# Altium PCB Intelligent_Agriculture.PcbDoc (part 1 of 5)
Units mm, origin at the board's own origin, x right, y up, seen from the top; angles counter-clockwise.
Board outline 99.69 x 99.69 mm, 2 copper layers (Top Layer, Bottom Layer); 90 components, 60 nets, 339 pads, 86 vias.
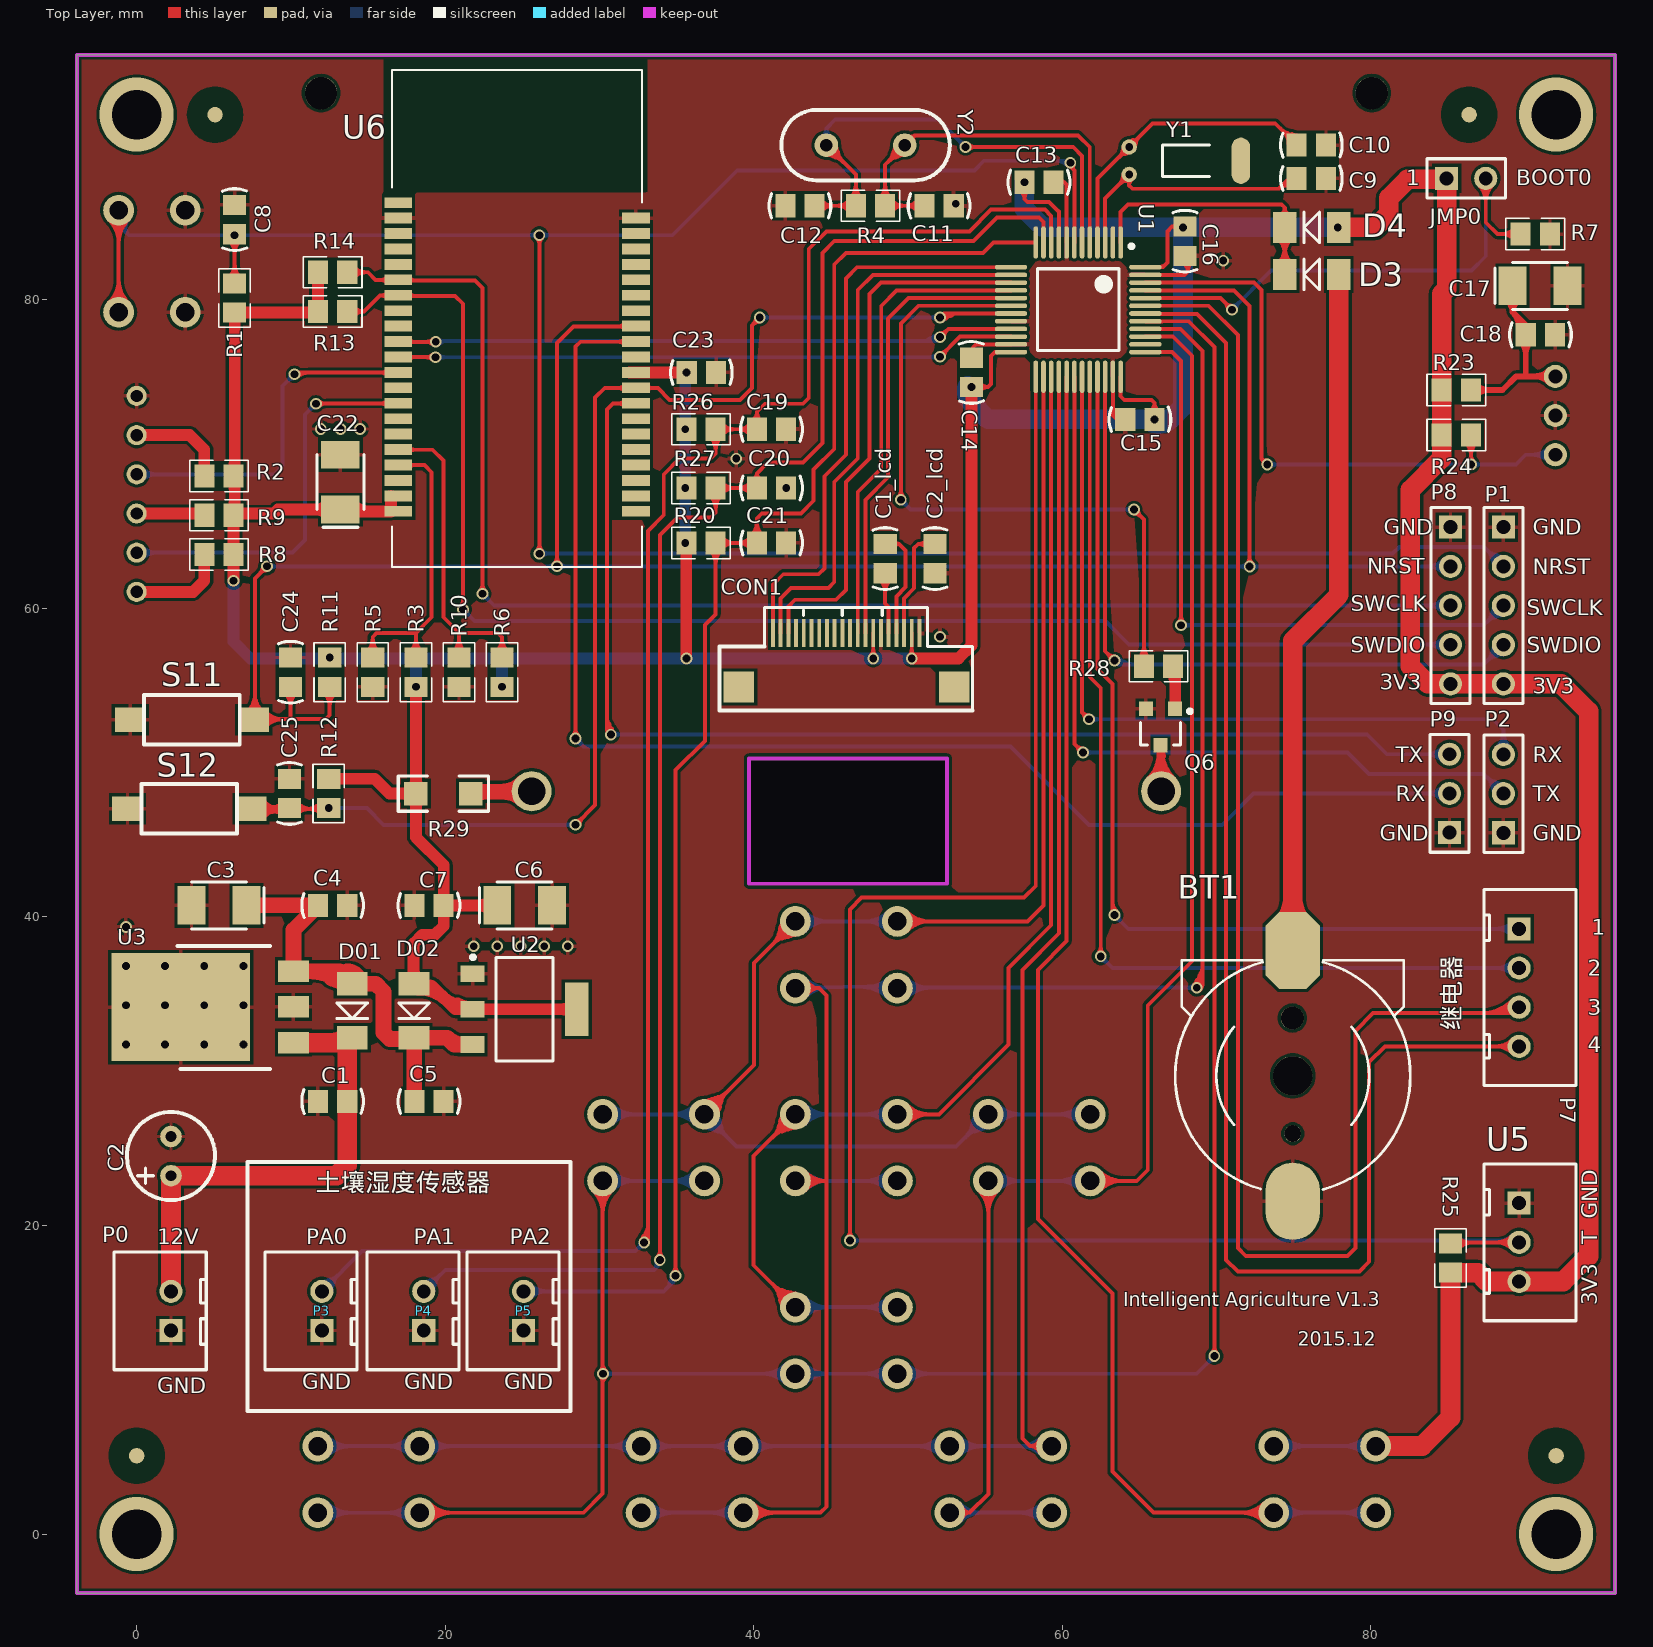
[diagram p0: Top Layer view]
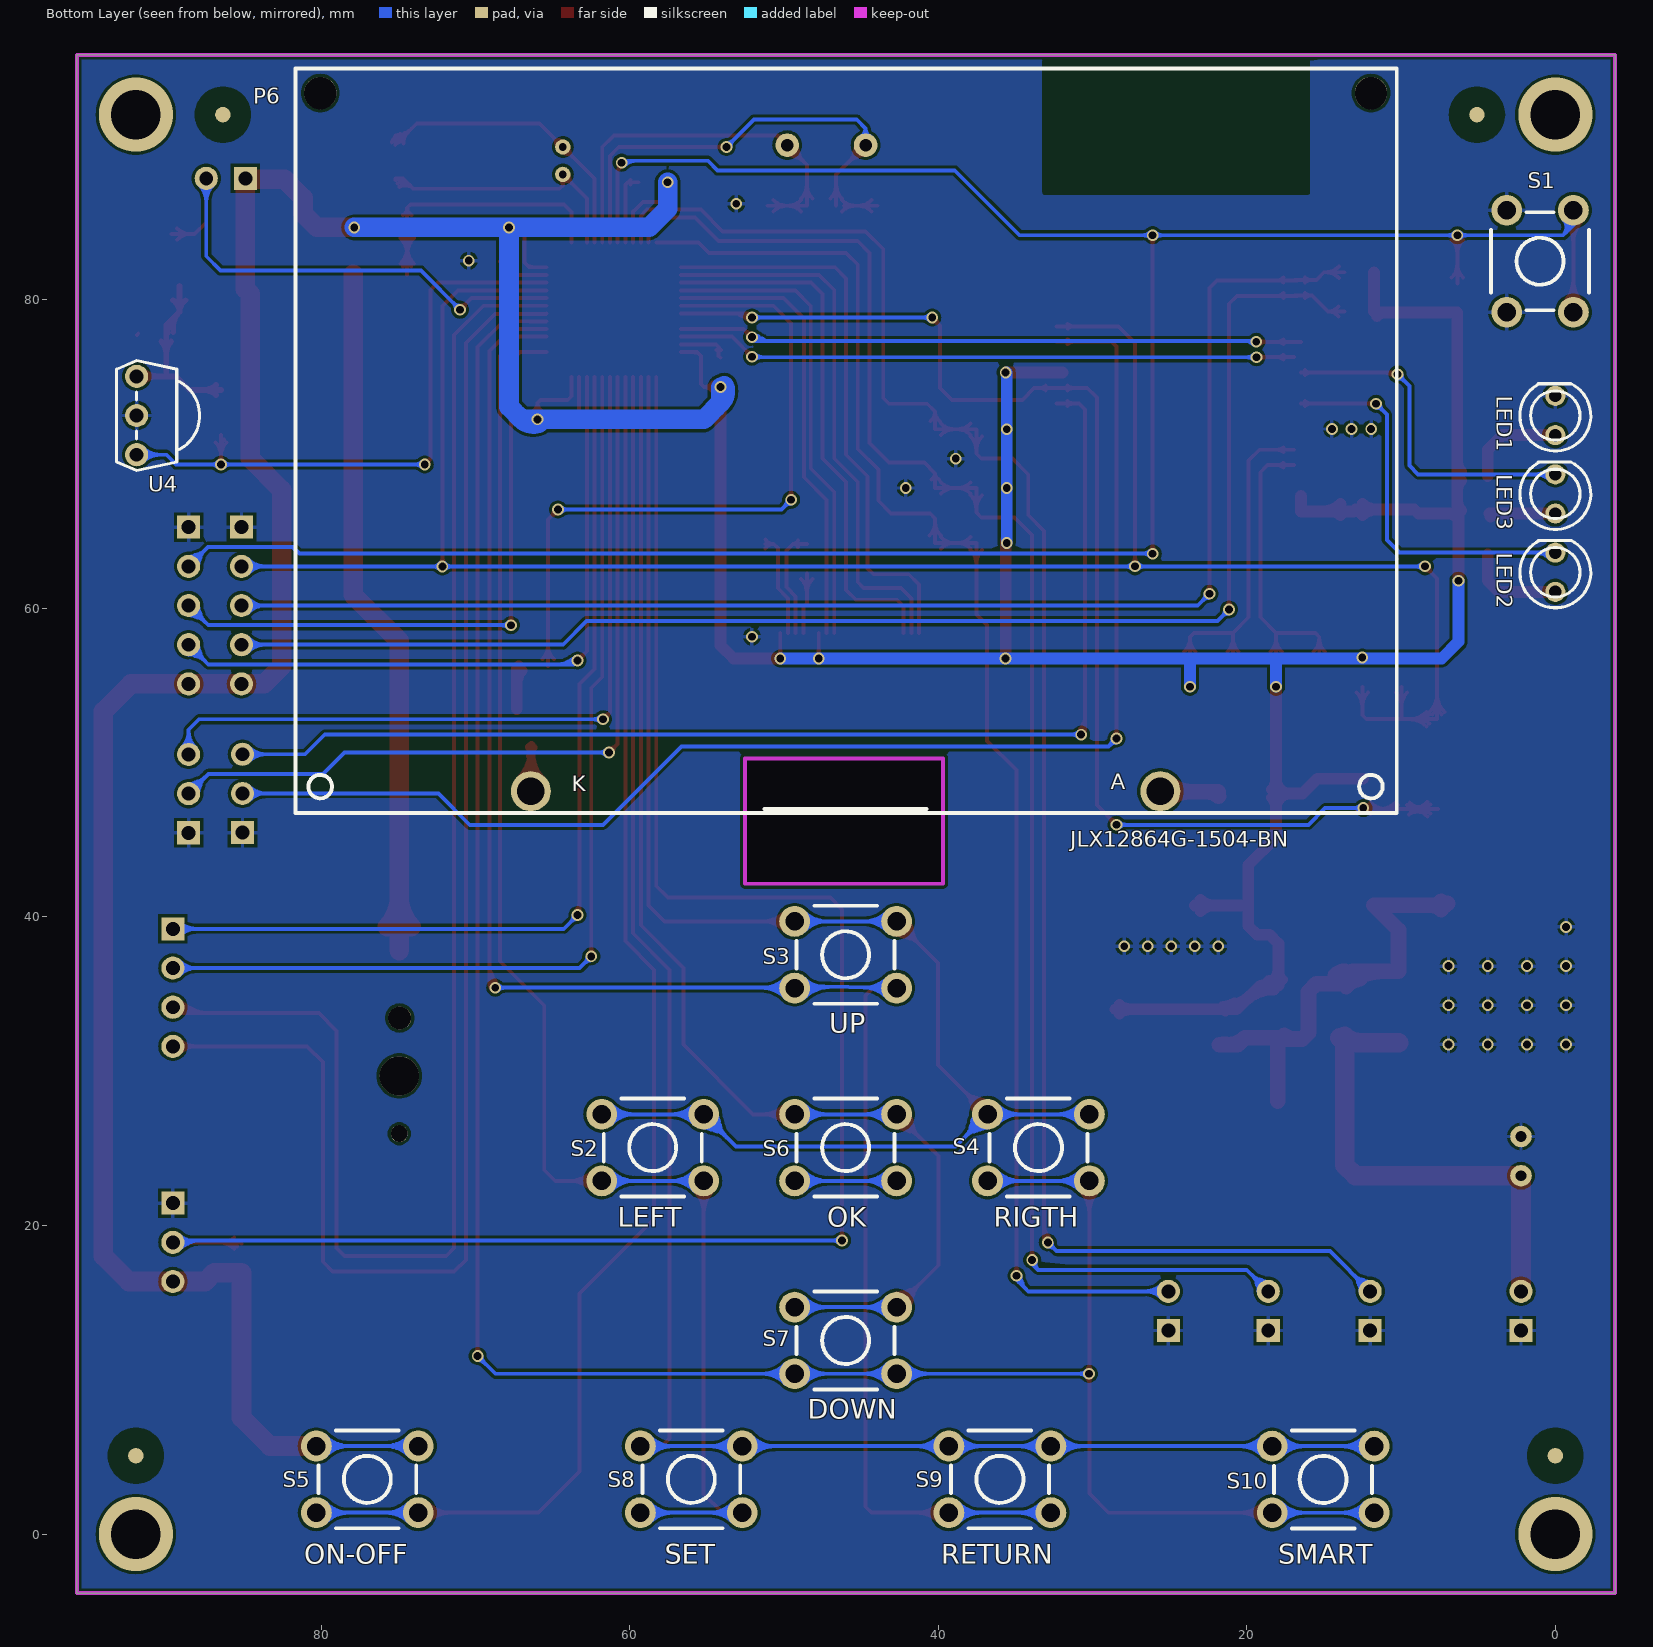
[diagram p1: Bottom Layer view, seen from below]

## Layer stack, top to bottom
Top Layer: signal copper 0.0356
Dielectric: dielectric 0.32, FR-4, Dk 4.8
Bottom Layer: signal copper 0.0356

## Board outline
-3.873,-3.822 -3.873,95.873 95.822,95.873 95.822,-3.822
cut-out: 52.515,50.28 39.688,50.28 39.688,42.152 52.515,42.152

## Design rules (kind name [scope] priority, off if disabled: settings)
Clearance [All] p1: gap=0.191
HoleSize [All] p1: absolutevalues=TRUE maxlimit=5.08 minlimit=0.025 maxpercent=80.000 minpercent=20.000
PolygonConnect [All] p1: connectstyle=Relief reliefconductorwidth=0.254 reliefentries=4 polygonreliefangle="90 Angle"
RoutingVias [All] p1: holewidth=0.711 width=1.27 viastyle="Through Hole" minholewidth=0.711 minwidth=1.27 maxholewidth=0.711 maxwidth=1.27
SMDNeckDown [All] p1: percent=120.000
SilkscreenOverComponentPads SilkToSolderMaskClearance [IsPad] p1: minsilkscreentomaskgap=0.254
SolderMaskExpansion [All] p1: expansion=0.102
Width [All] p1: maxlimit=1.27 minlimit=0.203 preferedwidth=0.508
26 further rules are at their usual default settings.

## Classes and differential pairs
component class U_Intelligent_Agriculture: BT1 C1 C1_lcd C2 C2_lcd C3 C4 C5 C6 C7 C8 C9 C10 C11 C12 C13 C14 C15 C16 C17 C18 C19 C20 C21 CON1 D01 D02 D3 D4 JMP0 LED1 P0 P1 P2 P3 P4 P5 P6 P7 Q6 R1 R2 R4 R7 R20 R23 R24 R25 R26 R27 R28 R29 S1 S2 S3 S4 S5 S6 S7 S8 S9 S10 U1 U2 U3 U4 U5 Y1 Y2
component class U_Intelligent_Agriculture_Wifi: C22 C23 C24 C25 LED2 LED3 P8 P9 R3 R5 R6 R8 R9 R10 R11 R12 R13 R14 S11 S12 U6

## Components (designator, comment, footprint, x,y, rotation, side; value= is the part's Value field where it differs from the comment)
BT1 "Battery" CR1220 74.93,29.701 r180 top
C1 "Cap" C-RAD-0805 12.7,28.05 r180 top
C1_lcd "Cap" C-RAD-0805 48.514,63.229 r90 top
C2 "Cap Pol1" C-RB-2.54 2.223,24.499 r90 top
C2_lcd "Cap" C-RAD-0805 51.74,63.229 r270 top
C3 "Cap Pol" CAP-3528 5.334,40.75 r180 top
C4 "Cap" C-RAD-0805 12.7,40.75 r0 top
C5 "Cap" C-RAD-0805 18.948,28.05 r0 top
C6 "Cap Pol" CAP-3528 25.146,40.75 r0 top
C7 "Cap" C-RAD-0805 18.948,40.75 r180 top
C8 "Cap" C-RAD-0805 6.35,85.2 r270 top
C9 "Cap" C-RAD-0805 76.137,87.872 r0 top
C10 "Cap" C-RAD-0805 76.137,90.031 r0 top
C11 "Cap" C-RAD-0805 52.007,86.094 r0 top
C12 "Cap" C-RAD-0805 42.99,86.094 r180 top
C13 "Cap" C-RAD-0805 58.484,87.618 r0 top
C14 "Cap" C-RAD-0805 54.102,75.294 r90 top
C15 "Cap" C-RAD-0805 65.024,72.246 r180 top
C16 "Cap" C-RAD-0805 67.945,83.803 r270 top
C17 "Cap Pol" CAP-3528 90.957,80.907 r0 top
C18 "Cap" C-RAD-0805 90.983,77.732 r0 top
C19 "Cap" C-RAD-0805 41.148,71.611 r180 top
C20 "Cap" C-RAD-0805 41.148,67.801 r180 top
C21 "Cap" C-RAD-0805 41.148,64.245 r180 top
C22 "Cap Pol" CAP-3528 13.208,68.182 r90 top
C23 "Cap" C-RAD-0805 36.601,75.294 r180 top
C24 "Cap" C-RAD-0805 9.97,55.868 r90 top
C25 "Cap" C-RAD-0805 9.906,48.006 r90 top
CON1 "LCD_CON20" FPC0.5-20P-A 39.942,56.63 r180 top
D01 "Diode" DIODE-1206 13.97,35.67 r270 top
D02 "Diode" DIODE-1206 17.983,35.67 r270 top
D3 "Diode" DIODE-1206 77.915,81.649 r180 top
D4 "Diode" DIODE-1206 77.915,84.697 r180 top
JMP0 "Header 2" HDR2X1_A 84.9,87.872 r0 top
LED1 "LED0" LED_A2 0,72.5 r270 bottom
LED2 "LED0" LED_A2 0,62.34 r270 bottom
LED3 "LED0" LED_A2 0,67.42 r270 bottom
P0 "Header 2" HDR2X1_B1 2.223,13.196 r90 top
P1 "Header 5" HDR5_A1 88.583,65.266 r270 top
P2 "Header 3" HDR3X1_A 88.583,45.454 r90 top
P3 "Header 2" HDR2X1_B1 12.002,13.196 r90 top
P4 "Header 2" HDR2X1_B1 18.606,13.196 r90 top
P5 "Header 2" HDR2X1_B1 25.083,13.196 r90 top
P6 "LCDLEDAK" LCD_JLX12864G-1504 81.65,95 r180 bottom
P7 "Header 4" HDR4X1_B1 89.599,39.231 r270 top
P8 "Header 5" HDR5_A1 85.154,65.266 r270 top
P9 "Header 3" HDR3X1_A 85.09,45.466 r90 top
Q6 "S8050" SOT-23 66.358,52.312 r180 top
R1 "Res1" 0805-1 6.35,80.12 r270 top
R2 "Res1" 0805-1 5.334,68.58 r0 top
R3 "Res1" 0805-1 18.098,55.868 r270 top
R4 "Res1" 0805-1 47.562,86.094 r0 top
R5 "Res1" 0805-1 15.304,55.868 r270 top
R6 "Res1" 0805-1 23.686,55.868 r270 top
R7 "Res1" 0805-1 90.653,84.26 r0 top
R8 "Res1" 0805-1 5.334,63.5 r0 top
R9 "Res1" 0805-1 5.334,66.04 r0 top
R10 "Res1" 0805-1 20.892,55.868 r270 top
R11 "Res1" 0805-1 12.51,55.868 r270 top
R12 "Res1" 0805-1 12.446,48.006 r90 top
R13 "Res1" 0805-1 12.7,79.248 r0 top
R14 "Res1" 0805-1 12.7,81.788 r0 top
R20 "Res1" 0805-1 36.576,64.245 r180 top
R23 "Res1" 0805-1 85.535,74.156 r0 top
R24 "Res1" 0805-1 85.535,71.235 r0 top
R25 "Res1" 0805-1 85.154,17.895 r270 top
R26 "Res1" 0805-1 36.576,71.611 r180 top
R27 "Res1" 0805-1 36.576,67.801 r180 top
R28 "Res1" 0805-1 66.231,56.249 r180 top
R29 "Res1" 1206 19.876,47.994 r180 top
S1 "SW-PB4" SW_PB4_B1 0.99,82.5 r90 bottom
S2 "SW-LEFT" SW_PB4_B1 58.5,25.051 r180 bottom
S3 "SW-UP" SW_PB4_B1 46,37.551 r180 bottom
S4 "SW-RIGHT" SW_PB4_B1 33.5,25.051 r180 bottom
S5 "SW-WAIT" SW_PB4_B1 77,3.551 r180 bottom
S6 "SW-OK" SW_PB4_B1 46,25.051 r180 bottom
S7 "SW-DOWN" SW_PB4_B1 46,12.551 r180 bottom
S8 "SW-SET" SW_PB4_B1 56,3.551 r180 bottom
S9 "SW-ESC" SW_PB4_B1 36,3.551 r180 bottom
S10 "SW-SMART" SW_PB4_B1 15.05,3.544 r180 bottom
S11 "SW-PB2" SW_PB2-S-3*6*2.5 3.581,52.781 r0 top
S12 "SW-PB2" SW_PB2-S-3*6*2.5 3.404,47.015 r0 top
U1 "STM32F103C" LQFP-48_M 61.024,79.363 r270 top
U2 "AMS1117-3.3" SOT-223 25.146,34.019 r270 top
U3 "LM78M05" TO-252 10.16,31.86 r90 top
U4 "HS0038B" HS0038B 91.949,72.5 r90 bottom
U5 "DS18B20" HDR3X1_B1 89.599,21.451 r270 top
U6 "EMW3165" EMW3165 32.36,66.294 r90 top
Y1 "XTAL_SM" X-TC15_B 63.945,89.015 r90 top
Y2 "XTAL" X-HC49U 47.244,90.026 r0 top

## Footprints (in the part's own frame and the unit in brackets; to place one, negate y for a bottom-side part, rotate by r counter-clockwise, add the part's x,y. Pads: shape width x height; smd on the part's side, far side on the other; paste and mask are expansions set on the pad)
0805-1 [mm]
  rect 1.3x1.5 smd: 1(-0.95,0) 2(0.95,0)
  silkscreen extent -1.91,-1.02 1.91,1.02, body extent -1.14,-0.51 1.14,0.51, height 1
1206 [mil]
  rect 60x60 smd: 1(-70,0) 2(70,0)
  silkscreen extent -115,-45 115,45, body extent -75,-35 75,35, height 39
C-RAD-0805 [mm]
  rect 1.3x1.5 smd: 1(-0.95,0) 2(0.95,0)
  silkscreen extent -2,-0.79 2,0.79, body extent -1.27,-0.64 1.27,0.64, height 0.9
C-RB-2.54 [mm]
  round 1.4 hole 0.7: 1(-1.27,0) 2(1.27,0)
  silkscreen extent -2.85,-2.85 2.85,2.85
CAP-3528 [mm]
  rect 1.8x2.5 smd: 1(-1.778,0) 2(1.778,0)
  silkscreen extent -2.92,-1.52 1.78,1.52, body extent -1.91,-1.4 1.91,1.4, height 1.1
CR1220 [mm]
  round 1.1 hole 1.1: 0(0,3.75)
  round 2.54 hole 2.54: 0(0,0)
  round 1.5 hole 1.5: 0(0.025,-3.75)
  oct 3.5x5 smd: 1(0,-8.128)
  oval 3.5x5 smd: 2(0,8.128)
  silkscreen extent -7.62,-7.5 7.62,7.36
DIODE-1206 [mm]
  rect 1.5x2 smd: 1(0,0) 2(3.5,0)
  silkscreen extent 1.25,-1 2.25,1
EMW3165 [mm] "EMW365 wif"
  rect 0.7x1.8 smd: 1(0,0) 2(1,0) 3(2,0) 4(3,0) 5(4,0) 6(5,0) 7(6,0) 8(7,0) 9(8,0) 10(9,0) 11(10,0) 12(11,0) 13(12,0) 14(13,0) 15(14,0) 16(15,0) 17(16,0) 18(17,0) 19(18,0) 20(19,0) 21(19,15.4) 22(18,15.4) 23(17,15.4) 24(16,15.4) 25(15,15.4) 26(14,15.4) 27(13,15.4) 28(12,15.4) 29(11,15.4) 30(10,15.4) 31(9,15.4) 32(8,15.4) 33(7,15.4) 34(6,15.4) 35(5,15.4) 36(4,15.4) 37(3,15.4) 38(2,15.4) 39(1,15.4) 40(0,15.4) 41(20,15.4)
  silkscreen extent -3.6,-0.4 28.6,15.8
FPC0.5-20P-A [mm]
  rect 0.25x1.8 smd: 1(-1.296,-1.767) 2(-1.796,-1.767) 3(-2.296,-1.767) 4(-2.796,-1.767) 5(-3.296,-1.767) 6(-3.796,-1.767) 7(-4.296,-1.767) 8(-4.796,-1.767) 9(-5.296,-1.767) 10(-5.796,-1.767) 11(-6.296,-1.767) 12(-6.796,-1.767) 13(-7.296,-1.767) 14(-7.796,-1.767) 15(-8.296,-1.767) 16(-8.796,-1.767) 17(-9.296,-1.767) 18(-9.796,-1.767) 19(-10.296,-1.767) 20(-10.796,-1.767)
  rect 2x2 smd: A(-13.045,1.722) B(0.922,1.722)
  silkscreen extent -14.22,-3.43 2.16,3.26
HDR2X1_A [mm]
  rect 1.5x1.5 hole 0.9: 1(0,0)
  round 1.5 hole 0.9: 2(2.54,0)
  silkscreen extent -1.27,-1.27 3.81,1.27
HDR2X1_B1 [mm]
  rect 1.5x1.5 hole 0.9: 1(0,0)
  round 1.5 hole 0.9: 2(2.54,0)
  silkscreen extent -2.54,-2.29 5.08,3.68, body extent -2.41,-2.16 5.08,3.56, height 1.5
HDR3X1_A [mm]
  rect 1.5x1.5 hole 0.9: 1(0,0)
  round 1.5 hole 0.9: 2(2.54,0) 3(5.08,0)
  silkscreen extent -1.27,-1.27 6.35,1.27
HDR3X1_B1 [mm]
  rect 1.5x1.5 hole 0.9: 1(0,0)
  round 1.5 hole 0.9: 2(2.54,0) 3(5.08,0)
  silkscreen extent -2.54,-2.29 7.62,3.68, body extent -2.54,-2.29 7.62,3.68, height 1.5
HDR4X1_B1 [mm]
  rect 1.5x1.5 hole 0.9: 1(0,0)
  round 1.5 hole 0.9: 2(2.54,0) 3(5.08,0) 4(7.62,0)
  silkscreen extent -2.54,-2.29 10.16,3.68, body extent -2.41,-2.16 10.03,3.56, height 1.5
HDR5_A1 [mm] "Co"
  rect 1.5x1.5 hole 0.9: 1(0,0)
  round 1.5 hole 0.9: 2(2.54,0) 3(5.08,0) 4(7.62,0) 5(10.16,0)
  silkscreen extent -1.27,-1.27 11.43,1.27
HS0038B [mm]
  round 1.5 hole 0.9: 1(-2.54,0) 2(0,0) 3(2.54,0)
  silkscreen extent -3.56,-4.08 3.56,1.3
LCD_JLX12864G-1504 [mm]
  round 2.6 hole 1.8: 1(56.05,-46.85) 2(15.25,-46.85)
  round 2.1 hole 2.1: 3(1.6,-1.6) 4(69.7,-1.6)
  silkscreen extent 0,-48.26 71.37,0
LED_A2 [mm]
  round 1.3 hole 0.8: 1(1.27,0) 2(-1.27,0)
  silkscreen extent -2.06,-2.3 2.3,2.3
LQFP-48_M [mm] "Thi"
  oval 2.1x0.3 smd: 1(-4.354,2.75) 2(-4.354,2.25) 3(-4.354,1.75) 4(-4.354,1.25) 5(-4.354,0.75) 6(-4.354,0.25) 7(-4.354,-0.25) 8(-4.354,-0.75) 9(-4.354,-1.25) 10(-4.354,-1.75) 11(-4.354,-2.25) 12(-4.354,-2.75) 25(4.354,-2.75) 26(4.354,-2.25) 27(4.354,-1.75) 28(4.354,-1.25) 29(4.354,-0.75) 30(4.354,-0.25) 31(4.354,0.25) 32(4.354,0.75) 33(4.354,1.25) 34(4.354,1.75) 35(4.354,2.25) 36(4.354,2.75)
  oval 0.3x2.1 smd: 13(-2.75,-4.354) 14(-2.25,-4.354) 15(-1.75,-4.354) 16(-1.25,-4.354) 17(-0.75,-4.354) 18(-0.25,-4.354) 19(0.25,-4.354) 20(0.75,-4.354) 21(1.25,-4.354) 22(1.75,-4.354) 23(2.25,-4.354) 24(2.75,-4.354) 37(2.75,4.354) 38(2.25,4.354) 39(1.75,4.354) 40(1.25,4.354) 41(0.75,4.354) 42(0.25,4.354) 43(-0.25,4.354) 44(-0.75,4.354) 45(-1.25,4.354) 46(-1.75,4.354) 47(-2.25,4.354) 48(-2.75,4.354)
  silkscreen extent -4.22,-2.65 2.65,3.57, body extent -3.5,-3.5 3.5,3.5, height 1.6
SOT-23 [mm]
  rect 0.9x0.95 smd: 1(-0.95,-1.175) 2(0.95,-1.175) 3(0,1.175)
  silkscreen extent -2.03,-1.14 1.3,1.18
SOT-223 [mm]
  rect 1.1x1.55 smd: 1(-2.3,-3.375) 2(0,-3.375) 3(2.3,-3.375)
  rect 3.45x1.55 smd: 4(0,3.375)
  silkscreen extent -3.5,-3.48 3.35,1.85, body extent -3.3,-3.94 3.3,3.43, height 0.8
SW_PB2-S-3*6*2.5 [mm]
  rect 2x1.6 smd: 1(-4,0) 2(4,0)
  silkscreen extent -3.1,-1.6 3.1,1.6
SW_PB4_B1 [mm]
  round 2 hole 1.2: 1(-3.302,2.159) 2(-3.302,-2.159) 3(3.302,-2.159) 4(3.302,2.159)
  silkscreen extent -3.17,-3.17 3.17,3.17, body extent -3.18,-3.18 3.18,3.18, height 6
TO-252 [mm]
  rect 1.4x2 smd: 1(0,0) 2(2.311,0) 3(4.623,0)
  rect 7x9 smd: 4(2.3,7.3)
  silkscreen extent -1.72,1.52 6.26,7.51
X-HC49U [mil]
  round 60 hole 32: 1(-100,0) 2(100,0)
  silkscreen extent -215,-90 215,90
X-TC15_B [mm]
  round 1 hole 0.5: 1(-0.889,-0.381) 2(0.889,-0.381)
  oval 3x1.2 smd: 3(0,-7.62)
  silkscreen extent -1.02,-5.59 1.02,-2.54, body extent -1,-8.29 1,0, height 1.99

## Part data
BT1: library part B, "±¸·Ýµ"
C1 C1_lcd C2_lcd C4 C5 C7 C8 C9 C10 C11 C12 C13 C14 C15 C16 C18 C19 C20 C21 C23 C24 C25: "无极性"
C2: library part Ca, "µç½âµ"
C3 C6 C17: library part Cap, "钽电"
C22: library part C, "钽电"
CON1: "LCD接插"
D01 D02 D3 D4: library part D, "二极"
JMP0 P0 P1 P2 P3 P4 P5 P7: library part Header, "接插件"
LED1 LED2 LED3: "发光二"
P6: library part LCD, "LCD12864¿ò¼"
P8: "接插"
P9: library part Header, "接插"
Q6: library part B, "NPN三极"
R1 R2 R4 R7 R20 R23 R24 R25 R26 R27 R28 R29: library part R, "ÌùÆ¬µ"
R3 R5 R6 R8 R9 R10 R11 R12 R13 R14: "ÌùÆ¬µ"
S1 S2 S3 S4 S5 S6 S7 S8 S9 S10 S11 S12: library part SW-, "Î¢¶¯¿"
U1: library part ST, "STM32单片机48引脚"
U2: library part SPX1117M3-3.3, "3.3VÎÈÑ¹Ð"
U3: library part L, "5VÎÈÑ¹Ð"
U4: library part HS0, "红外接"
U5: library part DS1, "温度传"
U6: library part EMW31, "WIFI 模块"
Y1: library part X, "Ô²Öù¾"
Y2: library part XTA, "¾§Õ"

## Free pads (board coordinates)
  round 4.8 hole 3.2: 0(92,92) 1(0,92) 2(0,0) 3(92,0)
  round 1 all layers, no hole mask+1: 1(0,5.08) 1(0,5.08) 1(5.08,92) 1(86.36,92) 1(86.36,92) 1(92,5.08) 1(92,5.08)

## Via types
v1: diameter 0.762, hole 0.508, Top Layer to Bottom Layer, tented both sides, 82 vias
v2: diameter 4.8, hole 3.2, Top Layer to Bottom Layer, tented both sides, 4 vias

## Nets (pads, with @x,y where several pads share a name; then routed paths per layer and width w, separated by ;. In a path a pad name is that pad's centre, name@x,y a point inside that pad or via, vN(x,y) a via of type N, cw(c..) or ccw(c..) an arc to the next point about the centre after c; other vN are vias at no path point)
BOOT: R6.1 R10.1 U6.36 | length 35.1
  Top Layer w0.254: U6.36@16.922,70.282 19.178,70.282 19.876,69.584 19.876,59.424 20.892,58.408 ; R10.1@20.892,56.818 20.892,58.408 ; R6.1@23.686,56.818 23.686,58.154 23.432,58.408 20.892,58.408 ; U6.36@17.63,70.124 cw(c18.01,69.744) 18.01,70.282 ; U6.36@17.63,70.124 cw(c18.01,69.744) 18.01,70.282 ; U6.36@17.63,70.124 cw(c18.01,69.744) 18.01,70.282 ; U6.36@17.63,70.44 ccw(c18.01,70.82) 18.01,70.282 ; U6.36@17.63,70.44 ccw(c18.01,70.82) 18.01,70.282 ; U6.36@17.63,70.44 ccw(c18.01,70.82) 18.01,70.282 ; R10.1@20.522,57.188 ccw(c19.629,58.081) 20.892,58.081 ; R10.1@20.522,57.188 ccw(c19.629,58.081) 20.892,58.081 ; R10.1@20.522,57.188 ccw(c19.629,58.081) 20.892,58.081 ; 20.892,58.081 ccw(c22.155,58.081) R10.1@21.262,57.188 ; 20.892,58.081 ccw(c22.155,58.081) R10.1@21.262,57.188 ; 20.892,58.081 ccw(c22.155,58.081) R10.1@21.262,57.188 ; R6.1@23.316,57.188 ccw(c22.423,58.081) 23.686,58.081 ; R6.1@23.316,57.188 ccw(c22.423,58.081) 23.686,58.081 ; R6.1@23.316,57.188 ccw(c22.423,58.081) 23.686,58.081 ; 23.686,58.081 ccw(c24.949,58.081) R6.1@24.056,57.188 ; 23.686,58.081 ccw(c24.949,58.081) R6.1@24.056,57.188 ; 23.686,58.081 ccw(c24.949,58.081) R6.1@24.056,57.188
BOOT0: JMP0.2 R7.1 U1.44 | length 71.5
  Top Layer w0.254: U1.44@65.378,80.113 70.238,80.113 v1(70.993,79.358) ; JMP0.2@87.44,87.872 87.44,85.009 88.189,84.26 R7.1@89.703,84.26 ; 70.559,79.792 ccw(c70.993,80.225) v1@70.993,79.612 ; 70.559,79.792 cw(c70.126,79.358) v1@70.739,79.358 ; 70.559,79.792 ccw(c70.993,80.225) v1@70.993,79.612 ; 70.559,79.792 cw(c70.126,79.358) v1@70.739,79.358 ; 70.559,79.792 ccw(c70.993,80.225) v1@70.993,79.612 ; 70.559,79.792 cw(c70.126,79.358) v1@70.739,79.358 ; 70.653,79.678 ccw(c71.082,79.793) v1(70.993,79.358) ; 70.653,79.678 ccw(c71.082,79.793) v1(70.993,79.358) ; 70.653,79.678 ccw(c71.082,79.793) v1(70.993,79.358) ; 70.673,79.698 cw(c70.558,79.269) v1(70.993,79.358) ; 70.673,79.698 cw(c70.558,79.269) v1(70.993,79.358) ; 70.673,79.698 cw(c70.558,79.269) v1(70.993,79.358) ; JMP0.2@86.999,87.431 cw(c85.936,86.368) 87.44,86.368 ; JMP0.2@86.999,87.431 cw(c85.936,86.368) 87.44,86.368 ; JMP0.2@86.999,87.431 cw(c85.936,86.368) 87.44,86.368 ; JMP0.2@87.179,87.611 cw(c86.549,86.981) 87.44,86.981 ; JMP0.2@87.179,87.611 cw(c86.549,86.981) 87.44,86.981 ; JMP0.2@87.179,87.611 cw(c86.549,86.981) 87.44,86.981 ; 87.44,86.368 cw(c88.944,86.368) JMP0.2@87.881,87.431 ; 87.44,86.368 cw(c88.944,86.368) JMP0.2@87.881,87.431 ; 87.44,86.368 cw(c88.944,86.368) JMP0.2@87.881,87.431 ; 87.44,86.981 cw(c88.331,86.981) JMP0.2@87.701,87.611 ; 87.44,86.981 cw(c88.331,86.981) JMP0.2@87.701,87.611 ; 87.44,86.981 cw(c88.331,86.981) JMP0.2@87.701,87.611 ; 88.44,84.26 ccw(c88.44,85.523) R7.1@89.333,84.63 ; 88.44,84.26 cw(c88.44,82.998) R7.1@89.333,83.89 ; 88.44,84.26 ccw(c88.44,85.523) R7.1@89.333,84.63 ; 88.44,84.26 cw(c88.44,82.998) R7.1@89.333,83.89 ; 88.44,84.26 ccw(c88.44,85.523) R7.1@89.333,84.63 ; 88.44,84.26 cw(c88.44,82.998) R7.1@89.333,83.89
  Bottom Layer w0.254: v1(70.993,79.358) 73.533,81.898 86.512,81.898 87.44,82.826 JMP0.2@87.44,87.872 ; v1@70.993,79.612 ccw(c70.993,80.225) 71.427,79.792 ; v1@70.993,79.612 ccw(c70.993,80.225) 71.427,79.792 ; v1@70.993,79.612 ccw(c70.993,80.225) 71.427,79.792 ; v1@71.247,79.358 cw(c71.86,79.358) 71.427,79.792 ; v1@71.247,79.358 cw(c71.86,79.358) 71.427,79.792 ; v1@71.247,79.358 cw(c71.86,79.358) 71.427,79.792 ; JMP0.2@86.999,87.431 cw(c85.936,86.368) 87.44,86.368 ; JMP0.2@86.999,87.431 cw(c85.936,86.368) 87.44,86.368 ; JMP0.2@86.999,87.431 cw(c85.936,86.368) 87.44,86.368 ; JMP0.2@87.179,87.611 cw(c86.549,86.981) 87.44,86.981 ; JMP0.2@87.179,87.611 cw(c86.549,86.981) 87.44,86.981 ; JMP0.2@87.179,87.611 cw(c86.549,86.981) 87.44,86.981 ; 87.44,86.368 cw(c88.944,86.368) JMP0.2@87.881,87.431 ; 87.44,86.368 cw(c88.944,86.368) JMP0.2@87.881,87.431 ; 87.44,86.368 cw(c88.944,86.368) JMP0.2@87.881,87.431 ; 87.44,86.981 cw(c88.331,86.981) JMP0.2@87.701,87.611 ; 87.44,86.981 cw(c88.331,86.981) JMP0.2@87.701,87.611 ; 87.44,86.981 cw(c88.331,86.981) JMP0.2@87.701,87.611
E_LINK: C25.1 R12.1 S12.2 U1.19 U6.9 | length 181.8
  Top Layer w0.254: S12.2@7.602,46.99 R12.1@12.888,46.99 ; R12.1@12.954,47.056 R12.1@12.888,46.99 ; 31.052,74.277 33.783,74.277 34.544,73.516 39.116,73.516 39.878,74.278 39.878,78.342 v1(40.386,78.85) ; U6.9@32.322,74.282 30.34,74.282 29.718,73.66 29.718,47.244 v1(28.448,45.974) ; U1.19@56.67,79.113 52.333,79.113 v1(52.07,78.85) ; S12.2@8.098,46.694 cw(c8.814,45.978) 8.814,46.99 ; S12.2@8.098,46.694 cw(c8.814,45.978) 8.814,46.99 ; S12.2@8.098,46.694 cw(c8.814,45.978) 8.814,46.99 ; S12.2@8.098,47.286 ccw(c8.814,48.002) 8.814,46.99 ; S12.2@8.098,47.286 ccw(c8.814,48.002) 8.814,46.99 ; S12.2@8.098,47.286 ccw(c8.814,48.002) 8.814,46.99 ; S12.2@8.278,46.514 cw(c9.427,45.365) C25.1@9.427,46.99 ; S12.2@8.278,46.514 cw(c9.427,45.365) C25.1@9.427,46.99 ; S12.2@8.278,46.514 cw(c9.427,45.365) C25.1@9.427,46.99 ; S12.2@8.278,47.466 ccw(c9.427,48.615) C25.1@9.427,46.99 ; S12.2@8.278,47.466 ccw(c9.427,48.615) C25.1@9.427,46.99 ; S12.2@8.278,47.466 ccw(c9.427,48.615) C25.1@9.427,46.99 ; S12.2@8.384,46.99 ccw(c8.384,48.478) C25.1@9.436,47.426 ; S12.2@8.384,46.99 ccw(c8.384,48.478) C25.1@9.436,47.426 ; S12.2@8.384,46.99 ccw(c8.384,48.478) C25.1@9.436,47.426 ; S12.2@8.385,47.325 ccw(c8.763,47.543) 8.876,47.122 ; S12.2@8.385,47.325 ccw(c8.763,47.543) 8.876,47.122 ; S12.2@8.385,47.325 ccw(c8.763,47.543) 8.876,47.122 ; S12.2@8.385,47.325 ccw(c8.763,47.543) 8.876,47.122 ; S12.2@8.385,47.325 ccw(c8.763,47.543) 8.876,47.122 ; S12.2@8.385,47.325 ccw(c8.763,47.543) 8.876,47.122 ; 8.421,46.727 cw(c9.054,46.458) 8.876,47.122 ; 8.421,46.727 cw(c9.054,46.458) 8.876,47.122 ; 8.421,46.727 cw(c9.054,46.458) 8.876,47.122 ; 8.421,46.727 cw(c9.054,46.458) 8.876,47.122 ; 8.421,46.727 cw(c9.054,46.458) 8.876,47.122 ; 8.421,46.727 cw(c9.054,46.458) 8.876,47.122 ; 8.672,46.788 ccw(c8.385,47.86) C25.1@9.351,47.313 ; 8.672,46.788 cw(c8.924,45.848) C25.1@9.498,46.634 ; 8.672,46.788 ccw(c8.385,47.86) C25.1@9.351,47.313 ; 8.672,46.788 cw(c8.924,45.848) C25.1@9.498,46.634 ; 8.672,46.788 ccw(c8.385,47.86) C25.1@9.351,47.313 ; 8.672,46.788 cw(c8.924,45.848) C25.1@9.498,46.634 ; 8.703,46.99 cw(c8.703,45.953) C25.1@9.436,46.686 ; 8.703,46.99 cw(c8.703,45.953) C25.1@9.436,46.686 ; 8.703,46.99 cw(c8.703,45.953) C25.1@9.436,46.686 ; 8.885,47.135 ccw(c8.995,47.544) C25.1@9.358,47.326 ; 8.885,47.135 ccw(c8.995,47.544) C25.1@9.358,47.326 ; 8.885,47.135 ccw(c8.995,47.544) C25.1@9.358,47.326 ; 8.922,47.125 cw(c8.738,46.44) C25.1@9.353,46.795 ; 8.922,47.125 cw(c8.738,46.44) C25.1@9.353,46.795 ; 8.922,47.125 cw(c8.738,46.44) C25.1@9.353,46.795 ; 8.997,46.99 ccw(c8.997,47.865) C25.1@9.616,47.246 ; 8.997,46.99 ccw(c8.997,47.865) C25.1@9.616,47.246 ; 8.997,46.99 ccw(c8.997,47.865) C25.1@9.616,47.246 ; C25.1@10.196,47.246 ccw(c10.815,47.865) 10.815,46.99 ; C25.1@10.196,47.246 ccw(c10.815,47.865) 10.815,46.99 ; C25.1@10.196,47.246 ccw(c10.815,47.865) 10.815,46.99 ; C25.1@10.376,46.686 cw(c11.109,45.953) 11.109,46.99 ; C25.1@10.376,46.686 cw(c11.109,45.953) 11.109,46.99 ; C25.1@10.376,46.686 cw(c11.109,45.953) 11.109,46.99 ; C25.1@10.376,47.426 ccw(c11.428,48.478) 11.428,46.99 ; C25.1@10.376,47.426 ccw(c11.428,48.478) 11.428,46.99 ; C25.1@10.376,47.426 ccw(c11.428,48.478) 11.428,46.99 ; 10.924,46.99 ccw(c10.924,48.478) R12.1@11.976,47.426 ; 10.924,46.99 ccw(c10.924,48.478) R12.1@11.976,47.426 ; 10.924,46.99 ccw(c10.924,48.478) R12.1@11.976,47.426 ; 11.243,46.99 cw(c11.243,45.953) R12.1@11.976,46.686 ; 11.243,46.99 cw(c11.243,45.953) R12.1@11.976,46.686 ; 11.243,46.99 cw(c11.243,45.953) R12.1@11.976,46.686 ; 11.537,46.99 ccw(c11.537,47.865) R12.1@12.156,47.246 ; 11.537,46.99 ccw(c11.537,47.865) R12.1@12.156,47.246 ; 11.537,46.99 ccw(c11.537,47.865) R12.1@12.156,47.246 ; 11.673,46.99 ccw(c11.673,47.829) R12.1@12.266,47.236 ; 11.673,46.99 ccw(c11.673,47.829) R12.1@12.266,47.236 ; 11.673,46.99 ccw(c11.673,47.829) R12.1@12.266,47.236 ; R12.1@11.992,46.99 cw(c11.992,46.602) R12.1@12.266,46.876 ; R12.1@11.992,46.99 cw(c11.992,46.602) R12.1@12.266,46.876 ; R12.1@11.992,46.99 cw(c11.992,46.602) R12.1@12.266,46.876 ; R12.1@12.629,46.88 cw(c12.888,46.63) R12.1@12.888,46.99 ; R12.1@12.629,46.88 cw(c12.888,46.63) R12.1@12.888,46.99 ; R12.1@12.629,46.88 cw(c12.888,46.63) R12.1@12.888,46.99 ; R12.1@12.687,47.135 ccw(c12.888,47.201) R12.1@12.888,46.99 ; R12.1@12.687,47.135 ccw(c12.888,47.201) R12.1@12.888,46.99 ; R12.1@12.687,47.135 ccw(c12.888,47.201) R12.1@12.888,46.99 ; v1(28.448,45.974) ccw(c28.359,46.409) 28.788,46.294 ; v1(28.448,45.974) cw(c28.883,45.885) 28.768,46.314 ; v1(28.448,45.974) ccw(c28.359,46.409) 28.788,46.294 ; v1(28.448,45.974) cw(c28.883,45.885) 28.768,46.314 ; v1(28.448,45.974) ccw(c28.359,46.409) 28.788,46.294 ; v1(28.448,45.974) cw(c28.883,45.885) 28.768,46.314 ; v1@28.448,46.228 ccw(c28.448,46.841) 28.882,46.408 ; v1@28.448,46.228 ccw(c28.448,46.841) 28.882,46.408 ; v1@28.448,46.228 ccw(c28.448,46.841) 28.882,46.408 ; v1@28.702,45.974 cw(c29.315,45.974) 28.882,46.408 ; v1@28.702,45.974 cw(c29.315,45.974) 28.882,46.408 ; v1@28.702,45.974 cw(c29.315,45.974) 28.882,46.408 ; 31.222,74.277 ccw(c31.222,74.832) U6.9@31.614,74.44 ; 31.222,74.277 ccw(c31.222,74.832) U6.9@31.614,74.44 ; 31.222,74.277 ccw(c31.222,74.832) U6.9@31.614,74.44 ; 31.234,74.282 ccw(c31.234,74.82) U6.9@31.614,74.44 ; 31.234,74.282 cw(c31.234,73.744) U6.9@31.614,74.124 ; 31.234,74.282 ccw(c31.234,74.82) U6.9@31.614,74.44 ; 31.234,74.282 cw(c31.234,73.744) U6.9@31.614,74.124 ; 31.234,74.282 ccw(c31.234,74.82) U6.9@31.614,74.44 ; 31.234,74.282 cw(c31.234,73.744) U6.9@31.614,74.124 ; 31.246,74.277 cw(c31.246,73.756) U6.9@31.614,74.124 ; 31.246,74.277 cw(c31.246,73.756) U6.9@31.614,74.124 ; 31.246,74.277 cw(c31.246,73.756) U6.9@31.614,74.124 ; U6.9@33.03,74.124 cw(c33.398,73.756) 33.398,74.277 ; U6.9@33.03,74.124 cw(c33.398,73.756) 33.398,74.277 ; U6.9@33.03,74.124 cw(c33.398,73.756) 33.398,74.277 ; U6.9@33.03,74.44 ccw(c33.422,74.832) 33.422,74.277 ; U6.9@33.03,74.44 ccw(c33.422,74.832) 33.422,74.277 ; U6.9@33.03,74.44 ccw(c33.422,74.832) 33.422,74.277 ; 39.952,78.416 ccw(c39.519,78.85) v1@40.132,78.85 ; 39.952,78.416 cw(c40.386,77.983) v1@40.386,78.596 ; 39.952,78.416 ccw(c39.519,78.85) v1@40.132,78.85 ; 39.952,78.416 cw(c40.386,77.983) v1@40.386,78.596 ; 39.952,78.416 ccw(c39.519,78.85) v1@40.132,78.85 ; 39.952,78.416 cw(c40.386,77.983) v1@40.386,78.596 ; 40.046,78.53 cw(c40.475,78.415) v1(40.386,78.85) ; 40.046,78.53 cw(c40.475,78.415) v1(40.386,78.85) ; 40.046,78.53 cw(c40.475,78.415) v1(40.386,78.85) ; 40.066,78.51 ccw(c39.951,78.939) v1(40.386,78.85) ; 40.066,78.51 ccw(c39.951,78.939) v1(40.386,78.85) ; 40.066,78.51 ccw(c39.951,78.939) v1(40.386,78.85) ; v1(52.07,78.85) cw(c52.705,78.215) 52.705,79.113 ; v1(52.07,78.85) cw(c52.705,78.215) 52.705,79.113 ; v1(52.07,78.85) ccw(c52.309,79.13) 52.493,78.811 ; v1(52.07,78.85) cw(c52.705,78.215) 52.705,79.113 ; v1(52.07,78.85) ccw(c52.309,79.13) 52.493,78.811 ; v1(52.07,78.85) ccw(c52.309,79.13) 52.493,78.811 ; v1@52.187,79.076 ccw(c52.323,79.341) 52.473,79.082 ; v1@52.187,79.076 ccw(c52.323,79.341) 52.473,79.082 ; v1@52.187,79.076 ccw(c52.323,79.341) 52.473,79.082 ; v1@52.235,79.043 ccw(c52.557,79.42) 52.804,78.991 ; v1@52.235,79.043 ccw(c52.557,79.42) 52.804,78.991 ; v1@52.235,79.043 ccw(c52.557,79.42) 52.804,78.991 ; v1@52.25,78.67 cw(c53.318,77.602) 53.318,79.113 ; v1@52.25,78.67 cw(c53.318,77.602) 53.318,79.113 ; v1@52.25,78.67 cw(c53.318,77.602) 53.318,79.113 ; v1@52.324,78.838 cw(c52.622,78.824) 52.473,79.082 ; v1@52.324,78.838 cw(c52.622,78.824) 52.473,79.082 ; v1@52.324,78.838 cw(c52.622,78.824) 52.473,79.082
  Bottom Layer w0.254: v1(12.446,47.056) 14.92,47.056 16.002,45.974 v1(28.448,45.974) ; v1(40.386,78.85) v1(52.07,78.85) ; v1@12.626,46.876 cw(c13.059,46.443) 13.059,47.056 ; v1@12.626,46.876 cw(c13.059,46.443) 13.059,47.056 ; v1@12.626,46.876 cw(c13.059,46.443) 13.059,47.056 ; v1@12.626,47.236 ccw(c13.059,47.669) 13.059,47.056 ; v1@12.626,47.236 ccw(c13.059,47.669) 13.059,47.056 ; v1@12.626,47.236 ccw(c13.059,47.669) 13.059,47.056 ; 27.835,45.974 ccw(c27.835,46.587) v1@28.268,46.154 ; 27.835,45.974 cw(c27.835,45.361) v1@28.268,45.794 ; 27.835,45.974 ccw(c27.835,46.587) v1@28.268,46.154 ; 27.835,45.974 cw(c27.835,45.361) v1@28.268,45.794 ; 27.835,45.974 ccw(c27.835,46.587) v1@28.268,46.154 ; 27.835,45.974 cw(c27.835,45.361) v1@28.268,45.794 ; v1@40.566,78.67 cw(c40.999,78.237) 40.999,78.85 ; v1@40.566,78.67 cw(c40.999,78.237) 40.999,78.85 ; v1@40.566,78.67 cw(c40.999,78.237) 40.999,78.85 ; v1@40.566,79.03 ccw(c40.999,79.463) 40.999,78.85 ; v1@40.566,79.03 ccw(c40.999,79.463) 40.999,78.85 ; v1@40.566,79.03 ccw(c40.999,79.463) 40.999,78.85 ; 51.457,78.85 ccw(c51.457,79.463) v1@51.89,79.03 ; 51.457,78.85 cw(c51.457,78.237) v1@51.89,78.67 ; 51.457,78.85 ccw(c51.457,79.463) v1@51.89,79.03 ; 51.457,78.85 cw(c51.457,78.237) v1@51.89,78.67 ; 51.457,78.85 ccw(c51.457,79.463) v1@51.89,79.03 ; 51.457,78.85 cw(c51.457,78.237) v1@51.89,78.67
E_RST: C24.1 P8.2 R11.2 S11.2 U1.45 U6.13 | length 216.5
  Top Layer w0.254: C24.1@9.97,54.918 9.97,52.82 ; R11.2@12.51,54.918 12.51,53.074 12.256,52.82 9.97,52.82 ; v1(27.242,62.726) 27.242,77.204 28.32,78.282 U6.13@32.322,78.282 ; U1.45@65.378,80.613 71.135,80.613 72.136,79.612 v1(72.136,62.721) ; S11.2@7.19,53.296 ccw(c6.041,54.445) 7.666,54.445 ; S11.2@7.19,53.296 ccw(c6.041,54.445) 7.666,54.445 ; S11.2@7.19,53.296 ccw(c6.041,54.445) 7.666,54.445 ; S11.2@7.37,53.116 ccw(c6.654,53.832) 7.666,53.832 ; S11.2@7.37,53.116 ccw(c6.654,53.832) 7.666,53.832 ; S11.2@7.37,53.116 ccw(c6.654,53.832) 7.666,53.832 ; 7.666,53.832 ccw(c8.678,53.832) S11.2@7.962,53.116 ; 7.666,53.832 ccw(c8.678,53.832) S11.2@7.962,53.116 ; 7.666,53.832 ccw(c8.678,53.832) S11.2@7.962,53.116 ; 7.666,54.445 ccw(c9.291,54.445) S11.2@8.142,53.296 ; 7.666,54.445 ccw(c9.291,54.445) S11.2@8.142,53.296 ; 7.666,54.445 ccw(c9.291,54.445) S11.2@8.142,53.296 ; 8.012,62.292 ccw(c7.579,62.726) v1@8.192,62.726 ; 8.012,62.292 cw(c8.446,61.859) v1@8.446,62.472 ; 8.012,62.292 ccw(c7.579,62.726) v1@8.192,62.726 ; 8.012,62.292 cw(c8.446,61.859) v1@8.446,62.472 ; 8.012,62.292 ccw(c7.579,62.726) v1@8.192,62.726 ; 8.012,62.292 cw(c8.446,61.859) v1@8.446,62.472 ; 8.106,62.406 cw(c8.535,62.291) v1(8.446,62.726) ; 8.106,62.406 cw(c8.535,62.291) v1(8.446,62.726) ; 8.106,62.406 cw(c8.535,62.291) v1(8.446,62.726) ; 8.126,62.386 ccw(c8.011,62.815) v1(8.446,62.726) ; 8.126,62.386 ccw(c8.011,62.815) v1(8.446,62.726) ; 8.126,62.386 ccw(c8.011,62.815) v1(8.446,62.726) ; S11.2@8.162,52.524 cw(c8.878,51.808) 8.878,52.82 ; S11.2@8.162,52.524 cw(c8.878,51.808) 8.878,52.82 ; S11.2@8.162,52.524 cw(c8.878,51.808) 8.878,52.82 ; S11.2@8.162,53.116 ccw(c8.878,53.832) 8.878,52.82 ; S11.2@8.162,53.116 ccw(c8.878,53.832) 8.878,52.82 ; S11.2@8.162,53.116 ccw(c8.878,53.832) 8.878,52.82 ; S11.2@8.342,52.344 cw(c9.491,51.195) 9.491,52.82 ; S11.2@8.342,52.344 cw(c9.491,51.195) 9.491,52.82 ; S11.2@8.342,52.344 cw(c9.491,51.195) 9.491,52.82 ; S11.2@8.342,53.296 ccw(c9.491,54.445) 9.491,52.82 ; S11.2@8.342,53.296 ccw(c9.491,54.445) 9.491,52.82 ; S11.2@8.342,53.296 ccw(c9.491,54.445) 9.491,52.82 ; v1(8.446,62.726) 7.666,61.946 7.666,52.82 9.97,52.82 ; C24.1@9.6,54.548 cw(c8.707,53.655) 9.97,53.655 ; C24.1@9.6,54.548 cw(c8.707,53.655) 9.97,53.655 ; C24.1@9.6,54.548 cw(c8.707,53.655) 9.97,53.655 ; 9.97,53.655 cw(c11.233,53.655) C24.1@10.34,54.548 ; 9.97,53.655 cw(c11.233,53.655) C24.1@10.34,54.548 ; 9.97,53.655 cw(c11.233,53.655) C24.1@10.34,54.548 ; R11.2@12.14,54.548 cw(c11.247,53.655) 12.51,53.655 ; R11.2@12.14,54.548 cw(c11.247,53.655) 12.51,53.655 ; R11.2@12.14,54.548 cw(c11.247,53.655) 12.51,53.655 ; 12.51,53.655 cw(c13.773,53.655) R11.2@12.88,54.548 ; 12.51,53.655 cw(c13.773,53.655) R11.2@12.88,54.548 ; 12.51,53.655 cw(c13.773,53.655) R11.2@12.88,54.548 ; v1@27.062,62.906 ccw(c26.629,63.339) 27.242,63.339 ; v1@27.062,62.906 ccw(c26.629,63.339) 27.242,63.339 ; v1@27.062,62.906 ccw(c26.629,63.339) 27.242,63.339 ; 27.242,63.339 ccw(c27.855,63.339) v1@27.422,62.906 ; 27.242,63.339 ccw(c27.855,63.339) v1@27.422,62.906 ; 27.242,63.339 ccw(c27.855,63.339) v1@27.422,62.906 ; 31.234,78.282 ccw(c31.234,78.82) U6.13@31.614,78.44 ; 31.234,78.282 cw(c31.234,77.744) U6.13@31.614,78.124 ; 31.234,78.282 ccw(c31.234,78.82) U6.13@31.614,78.44 ; 31.234,78.282 cw(c31.234,77.744) U6.13@31.614,78.124 ; 31.234,78.282 ccw(c31.234,78.82) U6.13@31.614,78.44 ; 31.234,78.282 cw(c31.234,77.744) U6.13@31.614,78.124 ; v1@71.956,62.901 ccw(c71.523,63.334) 72.136,63.334 ; v1@71.956,62.901 ccw(c71.523,63.334) 72.136,63.334 ; v1@71.956,62.901 ccw(c71.523,63.334) 72.136,63.334 ; 72.136,63.334 ccw(c72.749,63.334) v1@72.316,62.901 ; 72.136,63.334 ccw(c72.749,63.334) v1@72.316,62.901 ; 72.136,63.334 ccw(c72.749,63.334) v1@72.316,62.901
  Bottom Layer w0.254: v1(8.446,62.726) v1(27.242,62.726) P8.2@85.154,62.726 ; v1@8.626,62.546 cw(c9.059,62.113) 9.059,62.726 ; v1@8.626,62.546 cw(c9.059,62.113) 9.059,62.726 ; v1@8.626,62.546 cw(c9.059,62.113) 9.059,62.726 ; v1@8.626,62.906 ccw(c9.059,63.339) 9.059,62.726 ; v1@8.626,62.906 ccw(c9.059,63.339) 9.059,62.726 ; v1@8.626,62.906 ccw(c9.059,63.339) 9.059,62.726 ; 26.629,62.726 ccw(c26.629,63.339) v1@27.062,62.906 ; 26.629,62.726 cw(c26.629,62.113) v1@27.062,62.546 ; 26.629,62.726 ccw(c26.629,63.339) v1@27.062,62.906 ; 26.629,62.726 cw(c26.629,62.113) v1@27.062,62.546 ; 26.629,62.726 ccw(c26.629,63.339) v1@27.062,62.906 ; 26.629,62.726 cw(c26.629,62.113) v1@27.062,62.546 ; v1@27.422,62.546 cw(c27.855,62.113) 27.855,62.726 ; v1@27.422,62.546 cw(c27.855,62.113) 27.855,62.726 ; v1@27.422,62.546 cw(c27.855,62.113) 27.855,62.726 ; v1@27.422,62.906 ccw(c27.855,63.339) 27.855,62.726 ; v1@27.422,62.906 ccw(c27.855,63.339) 27.855,62.726 ; v1@27.422,62.906 ccw(c27.855,63.339) 27.855,62.726 ; 71.511,62.726 cw(c71.511,62.096) v1@71.956,62.541 ; 71.511,62.726 cw(c71.511,62.096) v1@71.956,62.541 ; 71.511,62.726 cw(c71.511,62.096) v1@71.956,62.541 ; 71.535,62.726 ccw(c71.535,63.322) v1@71.956,62.901 ; 71.535,62.726 ccw(c71.535,63.322) v1@71.956,62.901 ; 71.535,62.726 ccw(c71.535,63.322) v1@71.956,62.901 ; v1@72.316,62.541 cw(c72.761,62.096) 72.761,62.726 ; v1@72.316,62.541 cw(c72.761,62.096) 72.761,62.726 ; v1@72.316,62.541 cw(c72.761,62.096) 72.761,62.726 ; v1@72.316,62.901 ccw(c72.737,63.322) 72.737,62.726 ; v1@72.316,62.901 ccw(c72.737,63.322) 72.737,62.726 ; v1@72.316,62.901 ccw(c72.737,63.322) 72.737,62.726 ; 83.65,62.726 ccw(c83.65,64.23) P8.2@84.713,63.167 ; 83.65,62.726 cw(c83.65,61.222) P8.2@84.713,62.285 ; 83.65,62.726 ccw(c83.65,64.23) P8.2@84.713,63.167 ; 83.65,62.726 cw(c83.65,61.222) P8.2@84.713,62.285 ; 83.65,62.726 ccw(c83.65,64.23) P8.2@84.713,63.167 ; 83.65,62.726 cw(c83.65,61.222) P8.2@84.713,62.285 ; 84.263,62.726 ccw(c84.263,63.617) P8.2@84.893,62.987 ; 84.263,62.726 cw(c84.263,61.835) P8.2@84.893,62.465 ; 84.263,62.726 ccw(c84.263,63.617) P8.2@84.893,62.987 ; 84.263,62.726 cw(c84.263,61.835) P8.2@84.893,62.465 ; 84.263,62.726 ccw(c84.263,63.617) P8.2@84.893,62.987 ; 84.263,62.726 cw(c84.263,61.835) P8.2@84.893,62.465
E_RX: P9.2 U6.12 | length 108.8
  Top Layer w0.254: v1(28.448,51.562) 28.448,76.962 28.768,77.282 U6.12@32.322,77.282 ; v1@28.268,51.742 ccw(c27.835,52.175) 28.448,52.175 ; v1@28.268,51.742 ccw(c27.835,52.175) 28.448,52.175 ; v1@28.268,51.742 ccw(c27.835,52.175) 28.448,52.175 ; 28.448,52.175 ccw(c29.061,52.175) v1@28.628,51.742 ; 28.448,52.175 ccw(c29.061,52.175) v1@28.628,51.742 ; 28.448,52.175 ccw(c29.061,52.175) v1@28.628,51.742 ; 31.234,77.282 ccw(c31.234,77.82) U6.12@31.614,77.44 ; 31.234,77.282 cw(c31.234,76.744) U6.12@31.614,77.124 ; 31.234,77.282 ccw(c31.234,77.82) U6.12@31.614,77.44 ; 31.234,77.282 cw(c31.234,76.744) U6.12@31.614,77.124 ; 31.234,77.282 ccw(c31.234,77.82) U6.12@31.614,77.44 ; 31.234,77.282 cw(c31.234,76.744) U6.12@31.614,77.124
  Bottom Layer w0.254: v1(28.448,51.562) 28.956,51.054 56.642,51.054 61.722,45.974 70.358,45.974 72.39,48.006 P9.2@85.09,48.006 ; v1@28.448,51.308 cw(c28.448,50.695) 28.882,51.128 ; v1@28.448,51.308 cw(c28.448,50.695) 28.882,51.128 ; v1@28.448,51.308 cw(c28.448,50.695) 28.882,51.128 ; v1@28.702,51.562 ccw(c29.315,51.562) 28.882,51.128 ; v1@28.702,51.562 ccw(c29.315,51.562) 28.882,51.128 ; v1@28.702,51.562 ccw(c29.315,51.562) 28.882,51.128 ; 83.586,48.006 ccw(c83.586,49.51) P9.2@84.649,48.447 ; 83.586,48.006 cw(c83.586,46.502) P9.2@84.649,47.565 ; 83.586,48.006 ccw(c83.586,49.51) P9.2@84.649,48.447 ; 83.586,48.006 cw(c83.586,46.502) P9.2@84.649,47.565 ; 83.586,48.006 ccw(c83.586,49.51) P9.2@84.649,48.447 ; 83.586,48.006 cw(c83.586,46.502) P9.2@84.649,47.565 ; 84.199,48.006 ccw(c84.199,48.897) P9.2@84.829,48.267 ; 84.199,48.006 cw(c84.199,47.115) P9.2@84.829,47.745 ; 84.199,48.006 ccw(c84.199,48.897) P9.2@84.829,48.267 ; 84.199,48.006 cw(c84.199,47.115) P9.2@84.829,47.745 ; 84.199,48.006 ccw(c84.199,48.897) P9.2@84.829,48.267 ; 84.199,48.006 cw(c84.199,47.115) P9.2@84.829,47.745
E_TX: P9.3 U6.8 | length 105.1
  Top Layer w0.254: U6.8@32.322,73.282 30.864,73.282 30.48,72.898 30.48,52.07 v1(30.734,51.816) ; 30.48,52.429 ccw(c31.347,52.429) v1(30.734,51.816) ; 30.48,52.429 ccw(c31.347,52.429) v1(30.734,51.816) ; 30.48,52.429 ccw(c31.347,52.429) v1(30.734,51.816) ; 30.48,53.042 ccw(c31.96,53.042) v1@30.914,51.996 ; 30.48,53.042 ccw(c31.96,53.042) v1@30.914,51.996 ; 30.48,53.042 ccw(c31.96,53.042) v1@30.914,51.996 ; 30.51,52.205 ccw(c30.743,52.34) v1@30.738,52.07 ; 30.51,52.205 cw(c30.276,52.07) v1@30.512,51.939 ; 30.51,52.205 ccw(c30.743,52.34) v1@30.738,52.07 ; 30.51,52.205 cw(c30.276,52.07) v1@30.512,51.939 ; 30.51,52.205 ccw(c30.743,52.34) v1@30.738,52.07 ; 30.51,52.205 cw(c30.276,52.07) v1@30.512,51.939 ; v1@30.545,51.985 ccw(c30.192,52.3) 30.601,52.537 ; v1@30.545,51.985 ccw(c30.192,52.3) 30.601,52.537 ; v1@30.545,51.985 ccw(c30.192,52.3) 30.601,52.537 ; v1(30.734,51.816) ccw(c30.468,52.054) 30.777,52.232 ; v1(30.734,51.816) ccw(c30.468,52.054) 30.777,52.232 ; v1(30.734,51.816) ccw(c30.468,52.054) 30.777,52.232 ; 31.234,73.282 ccw(c31.234,73.82) U6.8@31.614,73.44 ; 31.234,73.282 cw(c31.234,72.744) U6.8@31.614,73.124 ; 31.234,73.282 ccw(c31.234,73.82) U6.8@31.614,73.44 ; 31.234,73.282 cw(c31.234,72.744) U6.8@31.614,73.124 ; 31.234,73.282 ccw(c31.234,73.82) U6.8@31.614,73.44 ; 31.234,73.282 cw(c31.234,72.744) U6.8@31.614,73.124
  Bottom Layer w0.254: v1(30.734,51.816) 79.756,51.816 81.026,50.546 P9.3@85.09,50.546 ; v1@30.914,51.636 cw(c31.347,51.203) 31.347,51.816 ; v1@30.914,51.636 cw(c31.347,51.203) 31.347,51.816 ; v1@30.914,51.636 cw(c31.347,51.203) 31.347,51.816 ; v1@30.914,51.996 ccw(c31.347,52.429) 31.347,51.816 ; v1@30.914,51.996 ccw(c31.347,52.429) 31.347,51.816 ; v1@30.914,51.996 ccw(c31.347,52.429) 31.347,51.816 ; 83.586,50.546 ccw(c83.586,52.05) P9.3@84.649,50.987 ; 83.586,50.546 cw(c83.586,49.042) P9.3@84.649,50.105 ; 83.586,50.546 ccw(c83.586,52.05) P9.3@84.649,50.987 ; 83.586,50.546 cw(c83.586,49.042) P9.3@84.649,50.105 ; 83.586,50.546 ccw(c83.586,52.05) P9.3@84.649,50.987 ; 83.586,50.546 cw(c83.586,49.042) P9.3@84.649,50.105 ; 84.199,50.546 ccw(c84.199,51.437) P9.3@84.829,50.807 ; 84.199,50.546 cw(c84.199,49.655) P9.3@84.829,50.285 ; 84.199,50.546 ccw(c84.199,51.437) P9.3@84.829,50.807 ; 84.199,50.546 cw(c84.199,49.655) P9.3@84.829,50.285 ; 84.199,50.546 ccw(c84.199,51.437) P9.3@84.829,50.807 ; 84.199,50.546 cw(c84.199,49.655) P9.3@84.829,50.285
GND: BT1.2 C1.2 C2.2 C2_lcd.2 C3.2 C4.2 C5.2 C6.2 C7.2 C8.1 C9.2 C10.2 C11.2 C12.2 C13.2 C14.2 C15.2 C16.2 C17.2 C18.2 C19.1 C20.1 C21.1 C22.2 C23.1 C24.2 C25.2 CON1.15 CON1.20 LED1.2 P0.1 P1.1 P2.1 P3.1 P4.1 P5.1 P8.1 P9.1 Q6.2 R5.2 R7.2 R10.2 S1.1 S1.4 S11.1 S12.1 U1.8 U1.20 U1.23 U1.35 U1.47 U2.1 U3.2 U3.4 U4.2 U5.1 U6.20 U6.21 | length 22.4
  Top Layer w0.254: C14.2@54.102,76.244 54.229,76.371 54.229,76.945 ; U1.23@56.67,77.113 54.397,77.113 54.229,76.945 ; C13.2@59.434,87.618 60.135,87.618 ; U1.8@60.274,83.717 60.274,87.479 60.135,87.618 ; U1.35@63.274,75.009 63.274,72.5 63.528,72.246 C15.2@64.074,72.246 ; U1.47@65.378,81.613 67.914,81.613 68.136,81.835 C16.2@68.136,82.477 ; C18.2@91.846,77.819 C18.2@91.933,77.732 ; C14.2@54.078,76.752 ccw(c54.03,76.945) 54.229,76.945 ; C14.2@54.078,76.752 ccw(c54.03,76.945) 54.229,76.945 ; C14.2@54.078,76.752 ccw(c54.03,76.945) 54.229,76.945 ; 54.229,76.945 ccw(c54.449,76.945) C14.2@54.376,76.737 ; 54.229,76.945 ccw(c54.449,76.945) C14.2@54.376,76.737 ; 54.229,76.945 ccw(c54.449,76.945) C14.2@54.376,76.737 ; C13.2@59.935,87.469 cw(c60.135,87.41) 60.135,87.618 ; C13.2@59.935,87.469 cw(c60.135,87.41) 60.135,87.618 ; C13.2@59.935,87.469 cw(c60.135,87.41) 60.135,87.618 ; C13.2@59.935,87.767 ccw(c60.135,87.826) 60.135,87.618 ; C13.2@59.935,87.767 ccw(c60.135,87.826) 60.135,87.618 ; C13.2@59.935,87.767 ccw(c60.135,87.826) 60.135,87.618 ; C16.2@67.799,82.391 cw(c67.501,81.831) 68.136,81.831 ; C16.2@67.799,82.391 cw(c67.501,81.831) 68.136,81.831 ; C16.2@67.799,82.391 cw(c67.501,81.831) 68.136,81.831 ; 68.136,81.831 cw(c69.038,81.831) C16.2@68.409,82.478 ; 68.136,81.831 cw(c69.038,81.831) C16.2@68.409,82.478 ; 68.136,81.831 cw(c69.038,81.831) C16.2@68.409,82.478
  other v1: -0.698,31.738 1.842,31.738 4.382,31.738 6.922,31.738 -0.698,34.278 1.842,34.278 4.382,34.278 6.922,34.278 -0.698,36.818 1.842,36.818 4.382,36.818 6.922,36.818 21.844,38.1 23.368,38.1 24.892,38.1 26.416,38.1 27.94,38.1 -0.698,39.358 52.07,58.166 42.098,67.801 38.862,69.706 11.938,71.628 13.208,71.628 14.478,71.628 70.422,82.538 53.084,86.221